# Altium PCB ModuleLamp.PcbDoc
Units mil, origin at the board's own origin, x right, y up, seen from the top; angles counter-clockwise.
Board outline 6000 x 4000 mil, 2 copper layers (Top Layer, Bottom Layer); 26 components, 32 nets, 118 pads, 0 vias.
Unrouted connection lines stored in the file: 69.
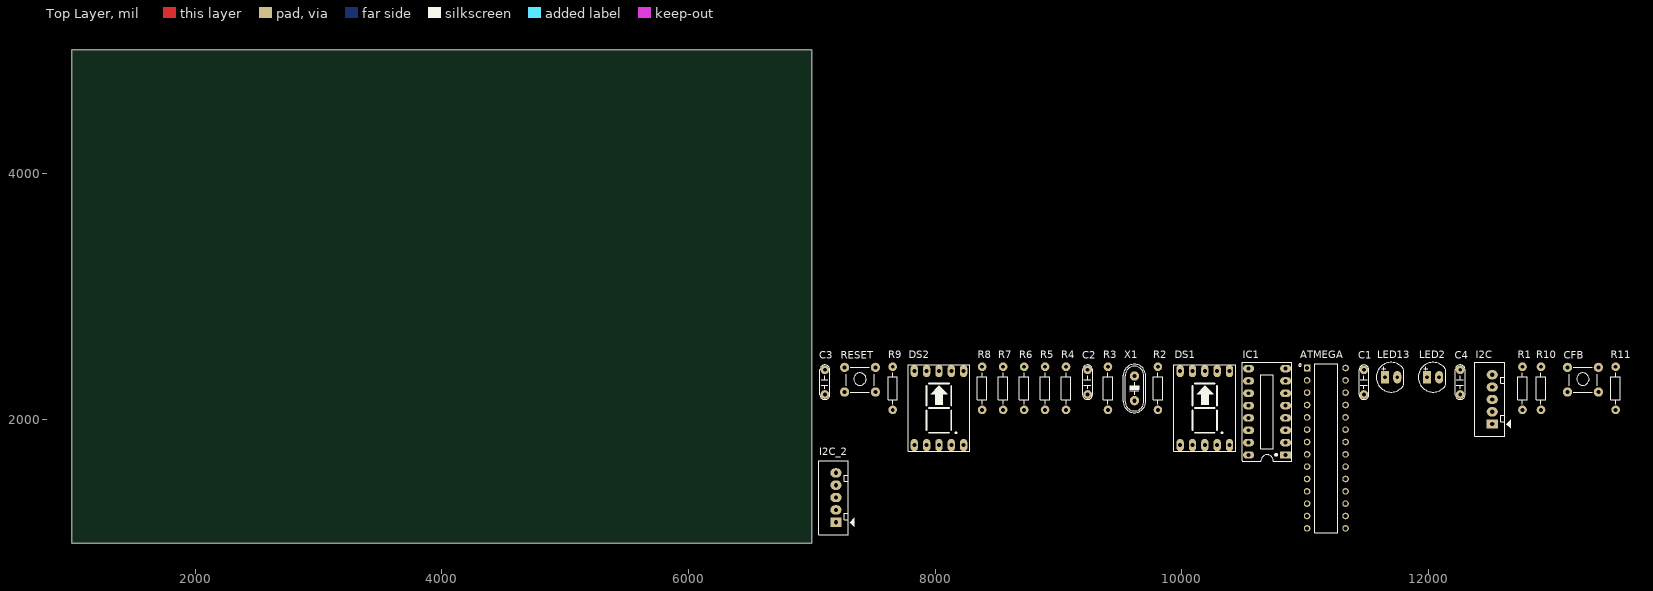
[diagram p0: Top Layer view]
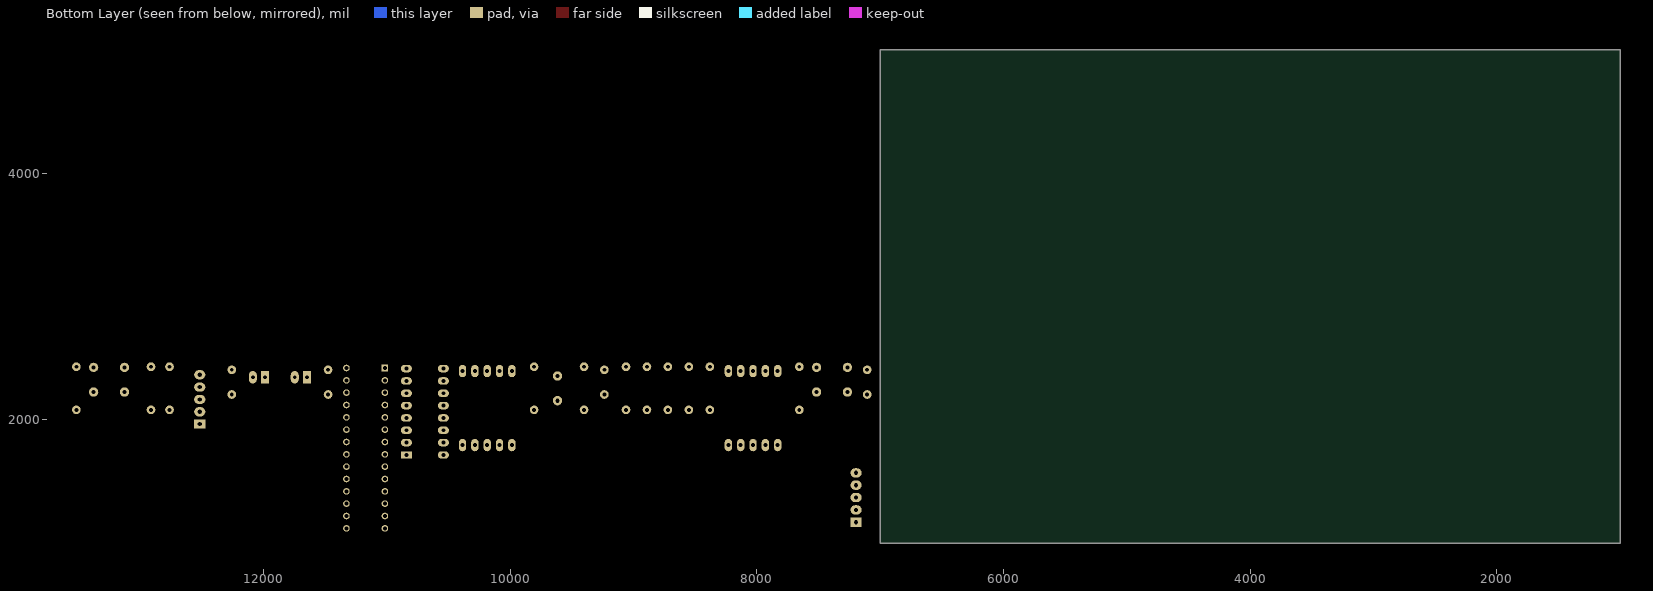
[diagram p1: Bottom Layer view, seen from below]

## Layer stack, top to bottom
Top Solder: solder mask 0.4, Solder Resist, Dk 3.5
Top Layer: signal copper 1.4
Dielectric 1: dielectric 12.6, FR-4, Dk 4.8
Bottom Layer: signal copper 1.4
Bottom Solder: solder mask 0.4, Solder Resist, Dk 3.5

## Board outline
1000,1000 7000,1000 7000,5000 1000,5000

## Design rules (kind name [scope] priority, off if disabled: settings)
Clearance [All] p1: gap=10 ignorepadtopadclearanceinfootprint=FALSE except(0: Arc-Hole Track-Hole SMDPad-Hole THPad-Hole Via-Hole Fill-Hole Poly-Hole Region-Hole Text-Hole)
PolygonConnect [All] p1: connectstyle=Relief reliefconductorwidth=10 reliefentries=4 polygonreliefangle="90 Angle" airgapwidth=10
RoomDefinition ModuleLamp [InComponentClass('ModuleLamp')] p1: confinementstyle=ConfineIn formatcopy=TRUE lockcomponents=FALSE outline 7045,1065 13625,1065 13625,2575 7045,2575
RoutingVias [All] p1: holewidth=28 width=50 viastyle="Through Hole" minholewidth=28 minwidth=50 maxholewidth=28 maxwidth=50
SolderMaskExpansion [All] p1: expansion=4 istentingtop=FALSE
Width [All] p1: maxlimit=10 minlimit=10 preferedwidth=10
30 further rules are at their usual default settings.

## Components (designator, comment, footprint, x,y, rotation, side; value= is the part's Value field where it differs from the comment)
ATMEGA "ATMEGA328P-PU" DIP794W46P254L2967H457Q28B 11170,1770 r0 top
C1 "104" CN2 11475,2205 r90 top value=0.1uF
C2 "104" CN2 9235,2205 r90 top value=0.1uF
C3 "104" CN2 7105,2205 r90 top value=0.1uF
C4 "104" CN2 12255,2205 r90 top value=0.1uF
CFB "SW" SW4 13125,2425 r0 top value="Button chip 4 pin"
DS1 "7SEG S" 7SEGS 9985,1795 r0 top value="LED 7S SEG"
DS2 "7SEG S" 7SEGS 7830,1795 r0 top value="LED 7S SEG"
I2C "JP5" CON5 12515,1965 r90 top value="Connector 5"
I2C_2 "JP6" CON5 7195,1170 r90 top value="Connector 5"
IC1 "74HC595" DIP16/W0.3 10840,1715 r90 top
LED2 "LED" LED-5-Green 11985,2345 r0 top value="LED 3 ly Single Colour"
LED13 "LED" LED-5-Green 11645,2345 r0 top value="LED 3 ly Single Colour"
R1 "Res1" R1/4W 12760,2080 r90 top value=220
R2 "Res1" R1/4W 9805,2080 r90 top value=220
R3 "Res1" R1/4W 9400,2080 r90 top value=220
R4 "Res1" R1/4W 9060,2080 r90 top value=220
R5 "Res1" R1/4W 8890,2080 r90 top value=220
R6 "Res1" R1/4W 8720,2080 r90 top value=220
R7 "Res1" R1/4W 8550,2080 r90 top value=220
R8 "Res1" R1/4W 8380,2080 r90 top value=220
R9 "Res1" R1/4W 7655,2080 r90 top value=1K
R10 "Res1" R1/4W 12910,2080 r90 top value=220
R11 "Res1" R1/4W 13515,2080 r90 top value=1K
RESET "SW" SW4 7265,2425 r0 top value="Button chip 4 pin"
X1 "16Mhz" XT2 9615,2255 r90 top value=4Mhz

## Footprints (in the part's own frame and the unit in brackets; to place one, negate y for a bottom-side part, rotate by r counter-clockwise, add the part's x,y. Pads: shape width x height; smd on the part's side, far side on the other; paste and mask are expansions set on the pad)
7SEGS [mil] "DIP 10 Leads; Body 12 x 15 mm; Pitch 0.5 mm"
  oval 60x100 hole 32: 1(0,0) 2(100,0) 3(200,0) 4(300,0) 5(400,0) 6(400,600) 7(300,600) 8(200,600) 9(100,600) 10(0,600)
  silkscreen extent -50,-50 450,650, body extent -50,-75 450,675, height 316
CN2 [mil]
  round 70 hole 31: 1(0,0) 2(200,0)
  silkscreen extent -40,-40 240,40, body extent -54,-44 260,55, height 407
CON5 [mil] "CON5"
  rect 75x90 hole 34: 1(0,0)
  oval 75x90 hole 34: 2(100,0) 3(200,0) 4(300,0) 5(400,0)
  silkscreen extent -100,-150 500,140
DIP16/W0.3 [mil] "16 PIN, W 300mil, Pin to pin 100mil"
  rect 60x90 hole 31: 1(0,0)
  oval 60x90 hole 31: 2(100,0) 3(200,0) 4(300,0) 5(400,0) 6(500,0) 7(600,0) 8(700,0) 9(700,300) 10(600,300) 11(500,300) 12(400,300) 13(300,300) 14(200,300) 15(100,300) 16(0,300)
  silkscreen extent -50,-50 750,350, body extent -52,-57 752,356, height 299
DIP794W46P254L2967H457Q28B [mm]
  rect 1.358x1.358 hole 0.85: 1(-3.96,16.51)
  round 1.358 hole 0.85: 2(-3.96,13.97) 3(-3.96,11.43) 4(-3.96,8.89) 5(-3.96,6.35) 6(-3.96,3.81) 7(-3.96,1.27) 8(-3.96,-1.27) 9(-3.96,-3.81) 10(-3.96,-6.35) 11(-3.96,-8.89) 12(-3.96,-11.43) 13(-3.96,-13.97) 14(-3.96,-16.51) 15(3.96,-16.51) 16(3.96,-13.97) 17(3.96,-11.43) 18(3.96,-8.89) 19(3.96,-6.35) 20(3.96,-3.81) 21(3.96,-1.27) 22(3.96,1.27) 23(3.96,3.81) 24(3.96,6.35) 25(3.96,8.89) 26(3.96,11.43) 27(3.96,13.97) 28(3.96,16.51)
  silkscreen extent -5.65,-17.4 2.38,17.4
LED-5-Green [mil] "LED 2 PIN, 5 ly , Only colour,pin to pin 100mil"
  rect 65x100 hole 32: 1(0,0)
  oval 65x100 hole 32: 2(100,0)
  silkscreen extent -70,-120 154,120, body extent -69,-120 145,117, height 339
R1/4W [mil] "R 1/4W, 2 Pin, 350mil"
  round 70 hole 31: 1(0,0) 2(350,0)
  silkscreen extent 48,-38 302,38, body extent -40,-47 386,47, height 111
SW4 [mil] "SW button 4pin, 250 x250 mil"
  round 75 hole 31: 1(0,0) 2(250,-200) 3(250,0) 4(0,-200)
  silkscreen extent 15,-215 240,0, body extent -36,-220 276,24, height 276
XT2 [mil] "Footpin for Crystal 2 pin"
  round 75 hole 34: 1(-100,0) 2(100,0)
  silkscreen extent -198,-90 195,90, body extent -233,-93 213,90, height 138

## Part data
ATMEGA: "AVR AVRÂ® ATmega Microcontroller IC 8-Bit 20MHz 32KB _16K x 16_ FLASH 28-PDIP", Package="PDIP-28 Atmel", Availability=Unavailable, MF=Microchip, MP=ATMEGA328P-PU, Price=None, SnapEDA_Link=https://www.snapeda.com/parts/ATMEGA328P-PU/Microchip/view-part/44282/?ref=snap
C1 C2 C3 C4: library part CN2, "Cap np 104 => 105pF"
CFB RESET: library part SW4, "Switch button 4 pin"
DS1 DS2: library part LED7S, "Single 7 Seg Dipslay"
I2C I2C_2: library part Con5, "Connector 5"
IC1: library part 74595, "8 Bit Serial input - Parallel Output"
LED2 LED13: "LED Single colour Green and Red"
R1 R2 R3 R4 R5 R6 R7 R8 R9 R10 R11: library part Res1_1, "Resistor", Manufacturer="Generic Components", Class=Passive, Published=08/06/2000, Publisher="Altium Hobart Technology Centre", SubClass=Resistor
X1: library part XT2, "Crystal For all Crystal 2pin."

## Nets (pads, with @x,y where several pads share a name; then routed paths per layer and width w, separated by ;. In a path a pad name is that pad's centre, name@x,y a point inside that pad or via, vN(x,y) a via of type N, cw(c..) or ccw(c..) an arc to the next point about the centre after c; other vN are vias at no path point)
+5: ATMEGA.7 ATMEGA.20 ATMEGA.21 I2C.1 I2C_2.1 IC1.10 R9.2 R11.2
a: DS1.7 DS2.7 R2.1
b: DS1.6 DS2.6 R3.1
c: DS1.4 DS2.4 R4.1
CFL: ATMEGA.18 I2C.2 I2C_2.2
CONF: ATMEGA.4 C4.1 CFB.1 CFB.3 R11.1
d: DS1.2 DS2.2 R5.1
DS: ATMEGA.11 IC1.14
e: DS1.1 DS2.1 R6.1
f: DS1.9 DS2.9 R7.1
g: DS1.10 DS2.10 R8.1
GND: ATMEGA.22 C1.1 C2.1 C3.2 C4.2 CFB.2 CFB.4 I2C.5 I2C_2.5 IC1.8 IC1.13 LED2.2 LED13.2 RESET.2 RESET.4
LED: ATMEGA.13 R10.1
LED13: ATMEGA.19 R1.1
NetIC1_1: IC1.1 R3.2
NetIC1_2: IC1.2 R4.2
NetIC1_3: IC1.3 R5.2
NetIC1_4: IC1.4 R6.2
NetIC1_5: IC1.5 R7.2
NetIC1_6: IC1.6 R8.2
NetIC1_15: IC1.15 R2.2
NetLED2_1: LED2.1 R10.2
NetLED13_1: LED13.1 R1.2
RESET: ATMEGA.1 C3.1 R9.1 RESET.1 RESET.3
SCL: ATMEGA.28 I2C.3 I2C_2.3
SDA: ATMEGA.27 I2C.4 I2C_2.4
SH: ATMEGA.12 IC1.12
Src1: ATMEGA.14 DS1.8
Src2: ATMEGA.15 DS2.8
ST: ATMEGA.6 IC1.11
XTAL1: ATMEGA.9 C1.2 X1.2
XTAL2: ATMEGA.10 C2.2 X1.1
pads on no net: ATMEGA.2 ATMEGA.3 ATMEGA.5 ATMEGA.8 ATMEGA.16 ATMEGA.17 ATMEGA.23 ATMEGA.24 ATMEGA.25 ATMEGA.26 DS1.3 DS1.5 DS2.3 DS2.5 IC1.7 IC1.9 IC1.16